# EAGLE board relay (EAGLE 7.1.0)
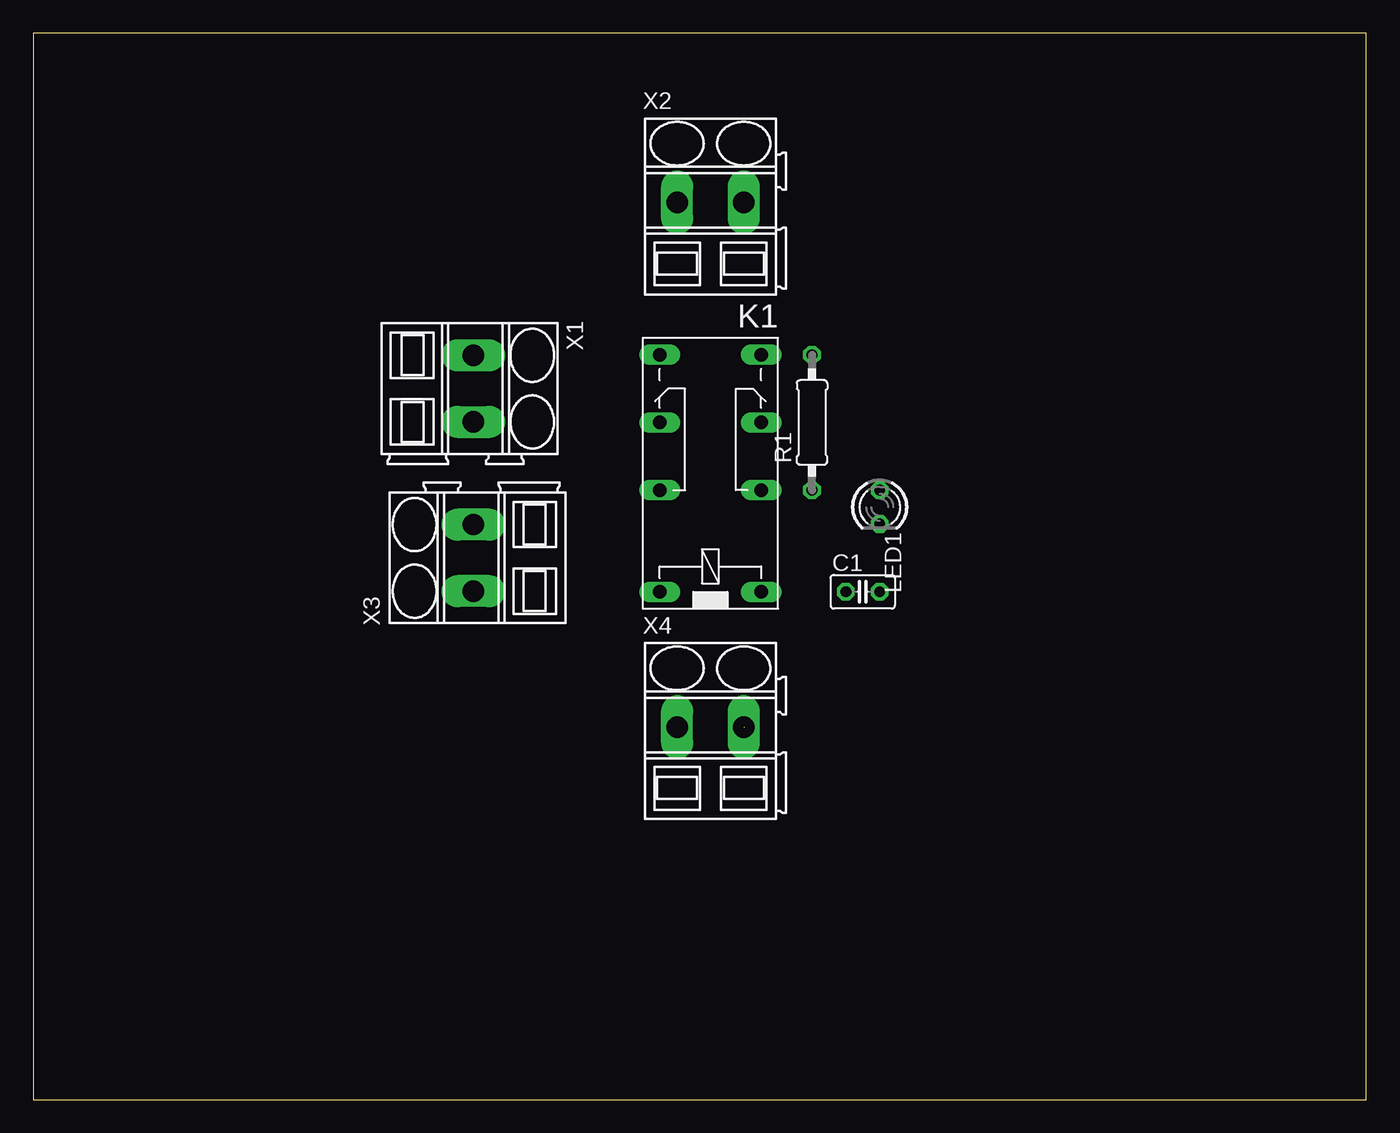
[diagram p0: board, top side]
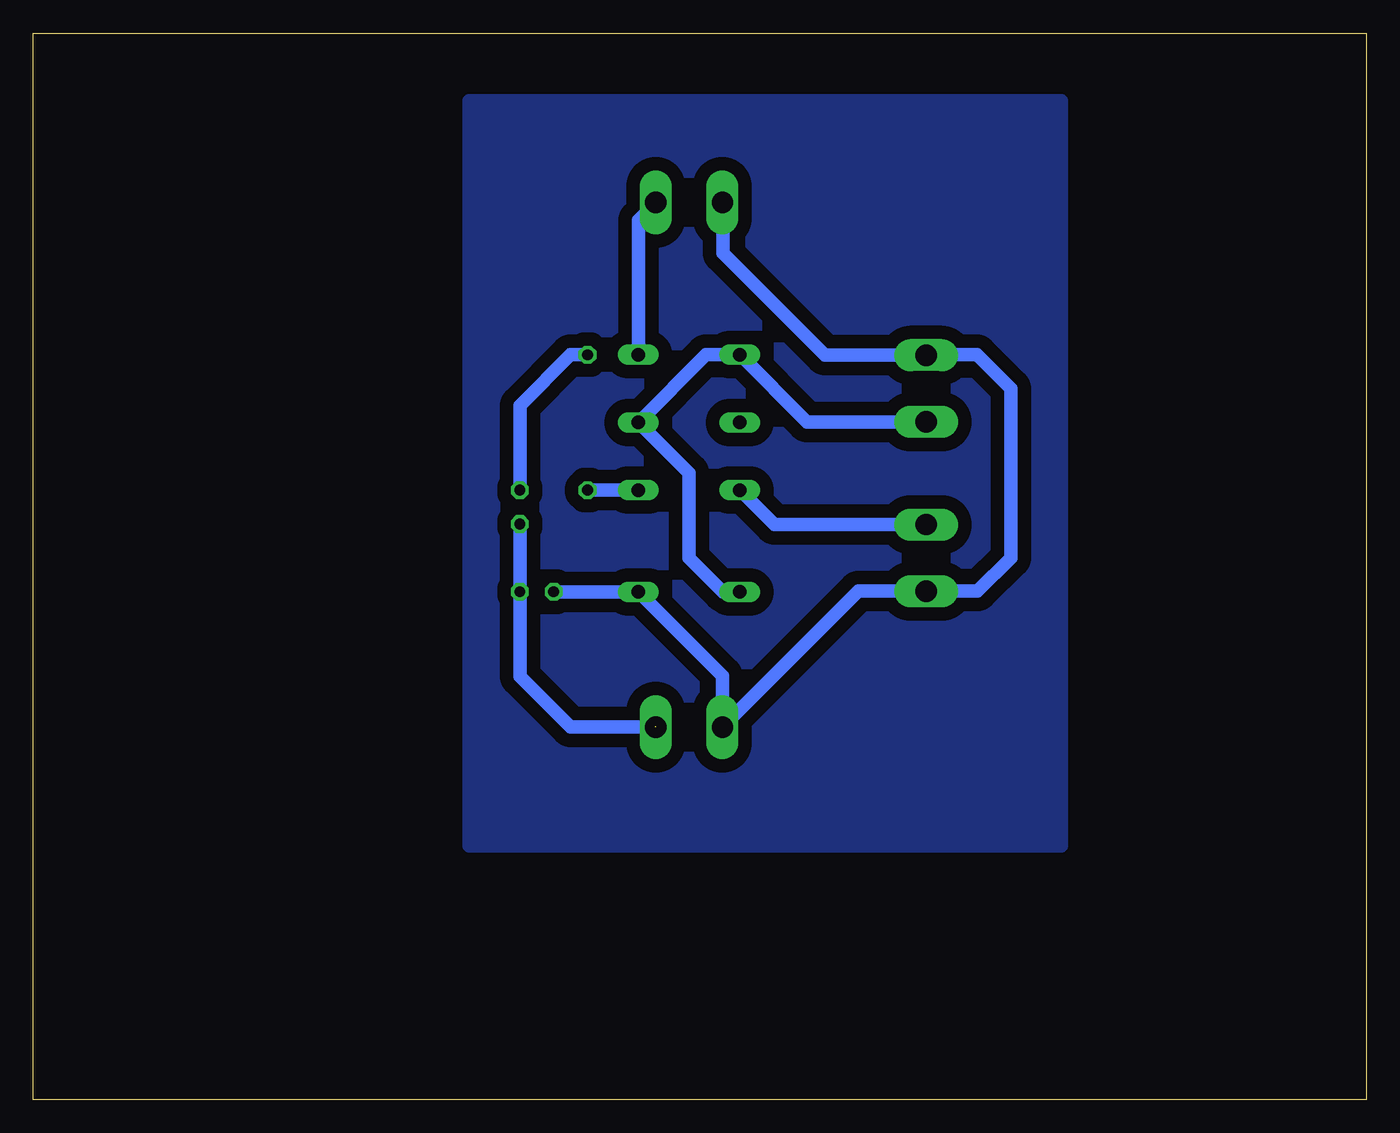
[diagram p1: board, bottom side, seen from below]

Size 100 x 80 mm. Coordinates in mm from the lower left corner, seen from the top.
Outline: 0,0 100,0 100,80 0,80 0,0
Copper layers (1*16): Top 0.035mm / dielectric 1.5mm / Bottom 0.035mm
Design rules "default": minimum track width 10mil, minimum drill 24mil, track to track 8mil, track to pad 8mil, pad to pad 8mil, via to via 8mil, smd to smd 8mil, copper to edge 40mil, drill to drill 8mil, minimum pad ring 10mil, minimum via ring 8mil, stop-mask expansion 4mil, vias tented up to drill 0mil, thermal gap 10mil

## Footprints (pad centres in the part's own frame; a part is rotated, then mirrored left to right if it is on the bottom)
C025-025X050 = drill 0.813 octagon: 1 -1.27,0; 2 1.27,0
351 = drill 1.016 long: 1 -3.81,-3.81; 16 -3.81,3.81; O1 8.89,-3.81; O2 8.89,3.81; P1 3.81,-3.81; P2 3.81,3.81; S1 13.97,-3.81; S2 13.97,3.81
LED3MM = drill 0.813 octagon: A -1.27,0; K 1.27,0
0207/10 = drill 0.813 octagon: 1 -5.08,0; 2 5.08,0
SMKDSP_1,5/2 = drill 1.6 pad 1.8 long: 1 -2.5,0; 2 2.5,0

## Placement (x,y rotation side)
C1  [C025-025X050]  62.23,38.1 0 top
K1  351  [351]  50.8,41.91 90 top
LED1  [LED3MM]  63.5,44.45 270 top
R1  [0207/10]  58.42,50.8 90 top
X1  SMKDSP_1,5/2  [SMKDSP_1,5/2]  33.02,53.34 270 top
X2  SMKDSP_1,5/2  [SMKDSP_1,5/2]  50.8,67.31 0 top
X3  SMKDSP_1,5/2  [SMKDSP_1,5/2]  33.02,40.64 90 top
X4  SMKDSP_1,5/2  [SMKDSP_1,5/2]  50.8,27.94 0 top

## Library data of the parts
C1 = rcl; SPICEPREFIX: C
K1 = relay; OC_FARNELL: unknown; OC_NEWARK: unknown
LED1 = led
R1 = rcl; SPICEPREFIX: R
X1-X4 = con-phoenix-smkdsp; MF: FARNELL; MPN: 1733570; OC_FARNELL: 3041244; OC_NEWARK: 69C8588

## Nets
GND: C1.1 K1.1 X1.1 X2.1 X3.1 X4.1
N$1: K1.P1 R1.1
N$2: LED1.A R1.2
O1: K1.S1 X2.2
P2: K1.P2 X3.2
S12: K1.16 K1.O1 K1.S2 X1.2
VOUT: C1.2 LED1.K X4.2

## Tracks (layer width: path | path; a pad name or v marks a point on that pad's centre or on a via)
GND
  Bottom 1.016: X2.1 48.26,67.27 48.26,63.5 40.6,55.84 X1.1 32.98,55.88 29.21,55.88 26.67,53.34 26.67,40.64 29.17,38.14 X3.1 38.1,38.14 X4.1 48.3,31.79 K1.1 C1.1
N$1
  Bottom 1.016: K1.P1 R1.1
N$2
  Bottom 1.016: R1.2 59.69,55.88 63.5,52.07 LED1.A
N$3
  pour Bottom (isolate 1.016): 22.86,74.93 22.86,19.05 67.31,19.05 67.31,74.93
O1
  Bottom 1.016: K1.S1 54.61,66 X2.2
P2
  Bottom 1.016: X3.2 44.41,43.14 K1.P2
S12
  Bottom 1.016: X1.2 41.95,50.84 K1.S2 49.53,55.88 K1.O1 50.8,46.99 50.8,40.64 48.26,38.1 K1.16
VOUT  (1 unrouted)
  Bottom 1.016: LED1.K C1.2 63.5,31.75 59.69,27.94 53.34,27.94